# Altium PCB Heartbeat_pcb.PcbDoc
Units mm, origin at the board's own origin, x right, y up, seen from the top; angles counter-clockwise.
Board outline 95.5 x 34 mm, 2 copper layers (Top Layer, Bottom Layer); 39 components, 26 nets, 118 pads, 43 vias.
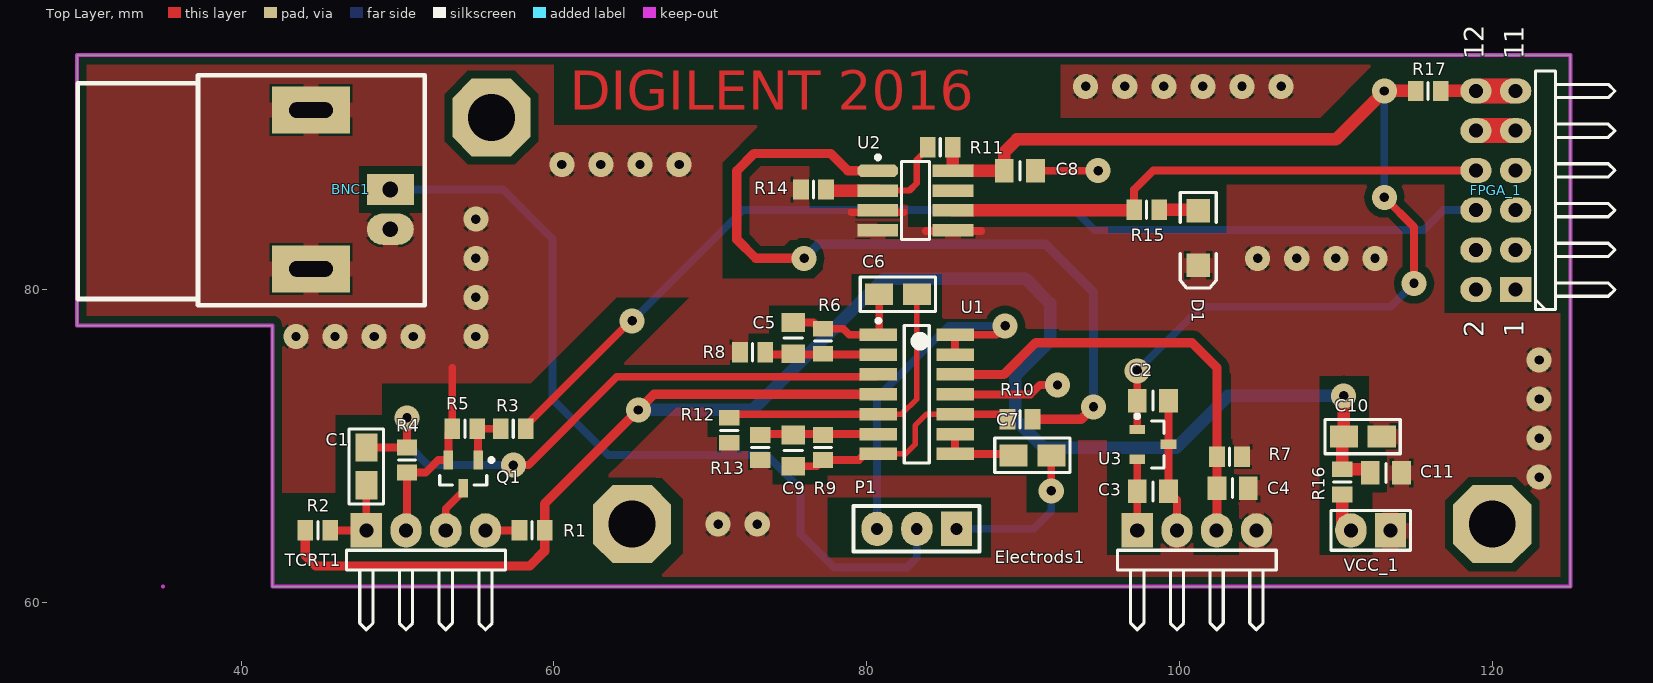
[diagram p0: Top Layer view]
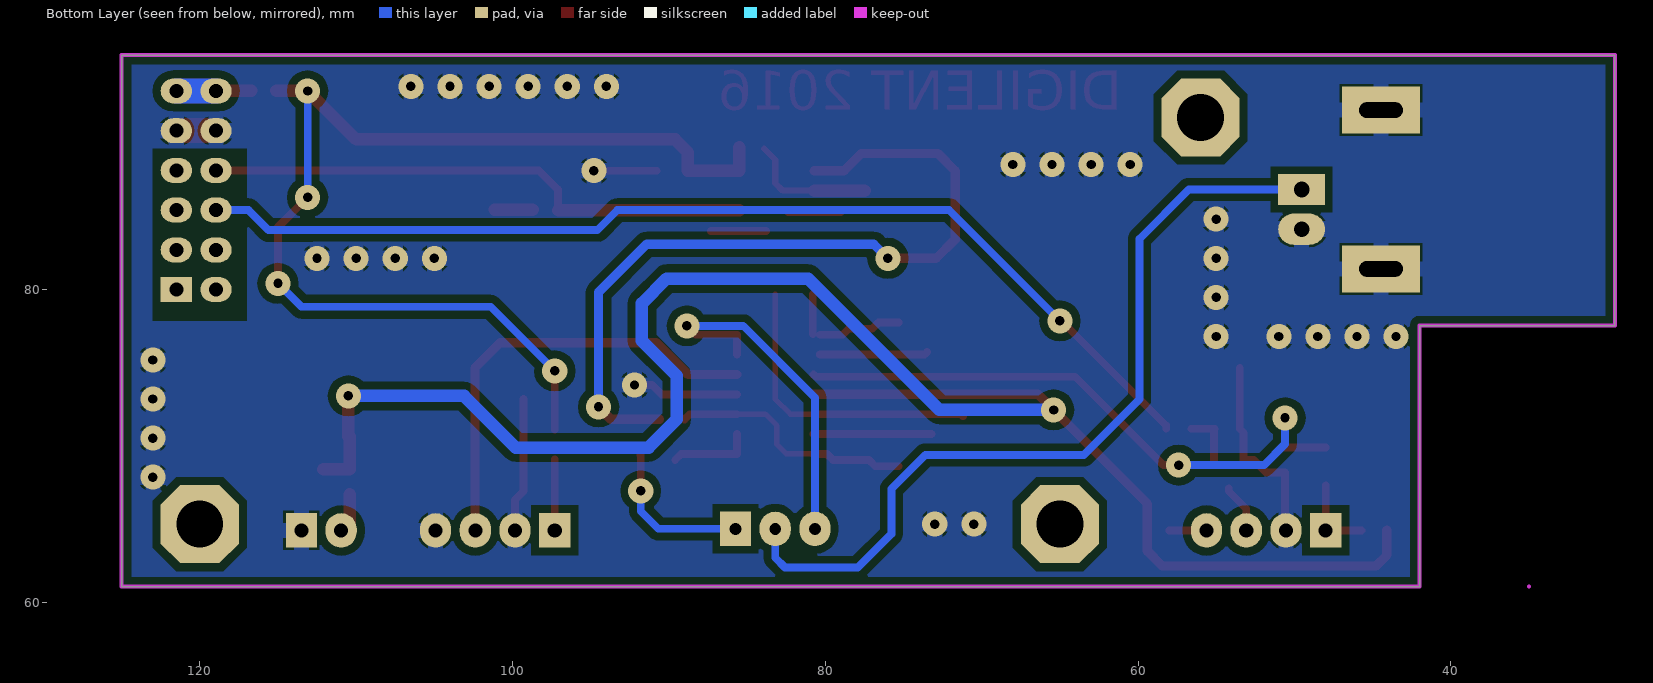
[diagram p1: Bottom Layer view, seen from below]
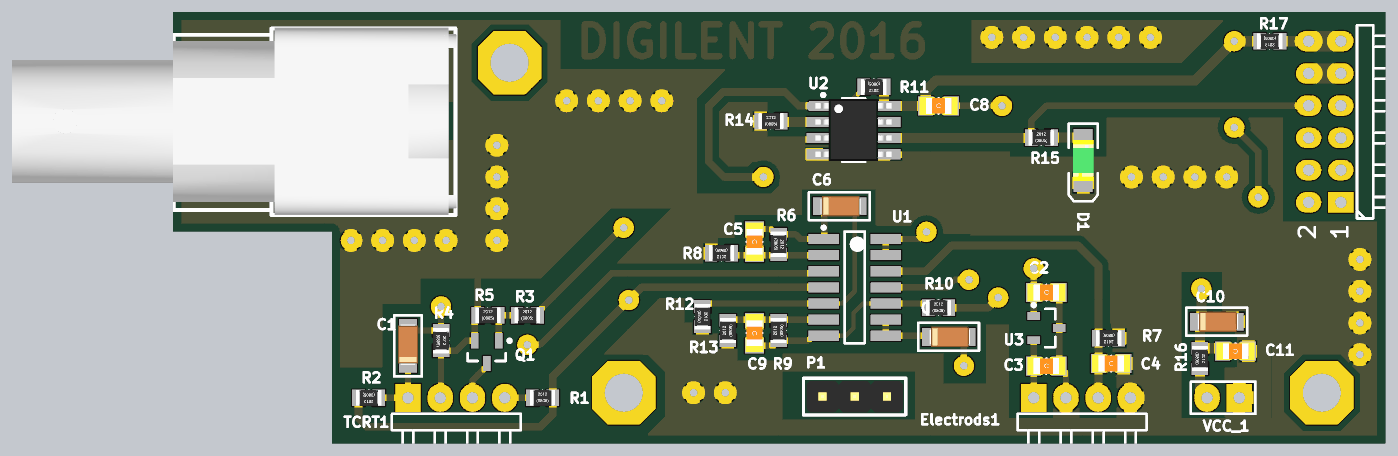
[diagram p2: 3D render of the assembled board from above, using the file's embedded part models]

## Layer stack, top to bottom
Top Solder: solder mask 0.0102, Solder Resist, Dk 3.5
Top Layer: signal copper 0.0356
Dielectric 1: dielectric 0.32, FR-4, Dk 4.8
Bottom Layer: signal copper 0.0356
Bottom Solder: solder mask 0.0102, Solder Resist, Dk 3.5

## Board outline
29.5,77.7 42,77.7 42,61 125,61 125,95 29.5,95

## Design rules (kind name [scope] priority, off if disabled: settings)
Clearance [All] p1: gap=0.25
ComponentClearance [All] p1: gap=0 collisioncheckmode=3 verticalgap=0 showdistances=FALSE
Height [All] p1: minheight=0 maxheight=50 prefheight=12.7
PolygonConnect [All] p1: connectstyle=Relief reliefconductorwidth=1 reliefentries=4 polygonreliefangle="90 Angle" airgapwidth=0.15
RoutingVias [All] p1: holewidth=0.6 width=1.6 viastyle="Through Hole" minholewidth=0.15 minwidth=0.45 maxholewidth=0.6 maxwidth=1.6
SolderMaskExpansion [All] p1: expansion=0.102
UnpouredPolygon [All] p1: allowunpoured=FALSE
Width [All] p1: maxlimit=3 minlimit=0.1 preferedwidth=0.5
27 further rules are at their usual default settings.

## Components (designator, comment, footprint, x,y, rotation, side; value= is the part's Value field where it differs from the comment)
BNC1 "BNC FEMALE CONN" "BNC CONNECTOR" 43,86.4 r90 top
C1 "Cap Pol1" "Condensator SMD tantal case A" 48,68.7 r90 top
C2 "Cap" "capacitor 2012[0805]" 98.3,72.9 r180 top
C3 "Cap" "capacitor 2012[0805]" 98.3,67.1 r180 top
C4 "Cap" "capacitor 2012[0805]" 103.4,67.3 r180 top
C5 "Cap" "capacitor 2012[0805]" 75.3,76.9 r90 top
C6 "Cap Pol1" "Condensator SMD tantal case A" 82,79.7 r0 top
C7 "Cap Pol1" "Condensator SMD tantal case A" 90.6,69.4 r0 top
C8 "Cap" "capacitor 2012[0805]" 89.8,87.6 r180 top
C9 "Cap" "capacitor 2012[0805]" 75.3,69.7 r90 top
C10 "Cap Pol1" "Condensator SMD tantal case A" 111.725,70.6 r0 top
C11 "Cap" "capacitor 2012[0805]" 113.2,68.275 r0 top
D1 "LED0" "led smd verde" 101.2,83.3 r270 top
Electrods1 "Header 4H" HDR1X4H 97.3,64.6 r0 top
FPGA_1 "Header 6X2H" HDR2X6H 121.5,80 r90 top
P1 "Header 3" hdr3 83.2,64.7 r180 top
Q1 "2N3904" SOT23-3L 54.2,68.2 r270 top
R1 "Res2" 2012(rezistor) 58.6,64.6 r0 top
R2 "Res2" 2012(rezistor) 44.9,64.6 r180 top
R3 "Res2" 2012(rezistor) 57.4,71.1 r0 top
R4 "Res2" 2012(rezistor) 50.6,69.1 r270 top
R5 "Res2" 2012(rezistor) 54.3,71.1 r0 top
R6 "Res2" 2012(rezistor) 77.2,76.7 r270 top
R7 "Res2" 2012(rezistor) 103.2,69.3 r180 top
R8 "Res2" 2012(rezistor) 72.7,76 r180 top
R9 "Res2" 2012(rezistor) 77.2,69.9 r90 top
R10 "Res2" 2012(rezistor) 89.8,71.7 r0 top
R11 "Res2" 2012(rezistor) 84.7,89.1 r180 top
R12 "Res2" 2012(rezistor) 71.2,71 r270 top
R13 "Res2" 2012(rezistor) 73.2,69.9 r90 top
R14 "Res2" 2012(rezistor) 76.6,86.4 r0 top
R15 "Res2" 2012(rezistor) 97.9,85.1 r0 top
R16 "Res2" 2012(rezistor) 110.4,67.7 r270 top
R17 "Res2" 2012(rezistor) 115.9,92.7 r180 top
TCRT1 "Header 4H" HDR1X4H 48,64.6 r0 top
U1 "MAX4094" SOIC127P600-14M 83.2,73.3 r0 top
U2 "Component_1" "SOIC 8 pini" 83.1,85.7 r0 top
U3 "MAX6061" SOT23-3_L 98.3,70.1 r0 top (schematic designator U*1)
VCC_1 "Header 2" HDR1X2 113.5,64.6 r180 top

## Footprints (in the part's own frame and the unit in brackets; to place one, negate y for a bottom-side part, rotate by r counter-clockwise, add the part's x,y. Pads: shape width x height; smd on the part's side, far side on the other; paste and mask are expansions set on the pad)
2012(rezistor) [mm] "Rezistor SMD (2,0 X 1,2) mm"
  rect 1x1.3 smd: 1(-0.8,0) 2(0.8,0)
  silkscreen extent 0,-0.55 0,0.55, body extent -1,-0.62 1,0.63, height 0.45
"BNC CONNECTOR" [mm]
  rect 2x3 hole 1 unplated: 1(0,-6.54)
  oval 2x3 hole 1 unplated: 2(-2.54,-6.54)
  rect 3x5 hole 1 slot 2.8 at 90 deg unplated: ""(-5.08,-1.46) ""(5.08,-1.46)
  silkscreen extent -7.4,-8.74 7.3,13.46, body extent -7.4,-8.84 7.36,26.21, height 16.29
"capacitor 2012[0805]" [mm]
  rect 1.2x1.5 smd: 1(-1,0) 2(1,0)
  silkscreen extent 0,-0.6 0,0.6, body extent -1.5,-0.7 1.5,0.7, height 0.93
"Condensator SMD tantal case A" [mm]
  rect 1.8x1.4 smd: 1(-1.21,0) 2(1.21,0)
  silkscreen extent -2.41,-1.1 2.39,1.1, body extent -1.51,-0.8 1.69,0.8, height 1.6
HDR1X2 [mm] "Connector; Header; 2 Position"
  rect 2x2.2 hole 0.9: 1(0,0)
  oval 2x2.2 hole 0.9: 2(2.54,0)
  silkscreen extent -1.27,-1.27 3.81,1.27
HDR1X4H [mm] "Connector; Header; 4 Position; Right Angle"
  rect 2x2.2 hole 0.9: 1(0,0)
  oval 2x2.2 hole 0.9: 2(2.54,0) 3(5.08,0) 4(7.62,0)
  silkscreen extent -1.27,-6.35 8.89,-1.27
HDR2X6H [mm] "Connector; Header; 6x2 Position; Right Angle"
  rect 1.6x2 hole 0.9: 1(0,0)
  oval 1.6x2 hole 0.9: 2(0,2.54) 3(2.54,0) 4(2.54,2.54) 5(5.08,0) 6(5.08,2.54) 7(7.62,0) 8(7.62,2.54) 9(10.16,0) 10(10.16,2.54) 11(12.7,0) 12(12.7,2.54)
  silkscreen extent -1.27,-6.35 13.97,-1.27
hdr3 [mm] "header 3 pini (2,54mm)"
  rect 2x2.2 hole 0.762: 1(-2.54,0)
  oval 2x2.2 hole 0.762: 2(0,0) 3(2.54,0)
  silkscreen extent -4.02,-1.45 4.04,1.45, body extent -3.81,-1.24 3.81,1.25, height 8.54
"led smd verde" [mm]
  rect 1.5x1.5 smd: 1(-1.75,0) 2(1.75,0)
  silkscreen extent -2.9,-1.15 3.2,1.15, body extent -1.6,-0.79 1.6,0.81, height 1.11
SOIC127P600-14M [mm] "SOIC, 14-Leads, Body 8.7x3.9mm, Pitch 1.27mm, IPC Low Density"
  rect 2.4x0.8 smd: 1(-2.45,3.81) 2(-2.45,2.54) 3(-2.45,1.27) 4(-2.45,0) 5(-2.45,-1.27) 6(-2.45,-2.54) 7(-2.45,-3.81) 8(2.45,-3.81) 9(2.45,-2.54) 10(2.45,-1.27) 11(2.45,0) 12(2.45,1.27) 13(2.45,2.54) 14(2.45,3.81)
  silkscreen extent -2.57,-4.4 0.8,4.83, body extent -2,-4.38 2,4.38, height 1.75
"SOIC 8 pini" [mm]
  oct 2.6x0.8 smd: 1(-2.387,1.905)
  rect 2.6x0.8 smd: 2(-2.387,0.635) 3(-2.387,-0.635) 4(-2.387,-1.905) 5(2.413,-1.905) 6(2.413,-0.635) 7(2.413,0.635) 8(2.413,1.905)
  silkscreen extent -2.51,-2.5 0.91,2.88, body extent -3,-2.45 3,2.45, height 1.75
SOT23-3_L [mm] "SOT23, 3-Leads, Body 2.9x1.3mm, Pitch 0.95mm, Lead Span 2.3mm, IPC High Density"
  rect 1x0.6 smd: 1(-1,0.95) 2(-1,-0.95) 3(1,0)
  silkscreen extent -1.12,-1.5 0.7,1.92, body extent -0.7,-1.5 0.7,1.5, height 1.2
SOT23-3L [mm] "SOT23, 3-Leads, Body 2.9x1.3mm, Pitch 0.95mm, Lead Span 2.5mm, IPC High Density"
  rect 1.2x0.6 smd: 1(-0.9,0.95) 2(-0.9,-0.95) 3(0.9,0)
  silkscreen extent -1.02,-1.5 0.7,1.93, body extent -0.7,-1.5 0.7,1.5, height 1.1

## Part data
C1 C6 C7 C10: "Polarized Capacitor (Radial)"
C2 C3 C4 C5 C8 C9 C11: "Capacitor"
D1: "Typical INFRARED GaAs LED"
Electrods1 TCRT1: "Header, 4-Pin, Right Angle"
FPGA_1: "Header, 6-Pin, Dual row, Right Angle"
P1: "Header, 3-Pin"
Q1: "NPN General Purpose Amplifier"
R1 R2 R3 R4 R5 R6 R7 R8 R9 R10 R11 R12 R13 R14 R15 R16 R17: "Resistor"
U3: "Precision, Micropower, Low-Dropout,  High-Output-Current, SOT23 Voltage References"
VCC_1: "Header, 2-Pin"

## Free pads (board coordinates)
  oct 5x5 hole 3: ""(56,91) ""(65,65) ""(120,65)

## Via types
v1: diameter 1.6, hole 0.6, Top Layer to Bottom Layer, 43 vias

## Nets (pads, with @x,y where several pads share a name; then routed paths per layer and width w, separated by ;. In a path a pad name is that pad's centre, name@x,y a point inside that pad or via, vN(x,y) a via of type N, cw(c..) or ccw(c..) an arc to the next point about the centre after c; other vN are vias at no path point)
+3.3V: C2.2 C8.2 R11.1 R17.2 U2.8 U3.1 | length 70.8
  Top Layer w0.5: U3.1 C2.2@97.3,73 ; C2.2 v1(97.3,74.8) ; v1(113.1,85.9) 115,84 v1(115,80.4)
  Top Layer w0.8: R11.1@85.513,89.087 U2.8 88.795,87.605 88.795,88.795 89.6,89.6 110,89.6 v1(113.1,92.7) R17.2
  Bottom Layer w0.5: v1(97.3,74.8) 101.4,78.9 113.5,78.9 v1(115,80.4) ; v1(113.1,85.9) v1(113.1,92.7)
+5V: C10.1 C11.1 R1.2 R2.2 R16.1 U1.4 | length 113.2
  Top Layer w0.6: R2.2 44.1,63 44.775,62.325 58.45,62.325 59.4,63.275 R1.2 59.4,66.3 66.4,73.3 U1.4
  Top Layer w0.8: C10.1@110.4,70.6 R16.1 C11.1@112.1,68.5 ; v1(110.5,73.2) 110.515,73.185 C10.1
  Bottom Layer w0.8: v1(65.4,72.3) 72.7,72.3 81.1,80.7 90.15,80.7 91.725,79.125 91.725,76.725 89.5,74.5 89.5,71.7 91.3,69.9 99.8,69.9 103.1,73.2 v1(110.5,73.2)
DGND: BNC1. BNC1.2 C2.1 C3.1 C4.1 C8.1 C10.2 C11.2 D1.2 Electrods1.2 Electrods1.4 FPGA_1.9 FPGA_1.10 Q1.2 R4.2 R5.1 R7.1 R8.2 R12.2 R13.1 R14.1 TCRT1.2 U1.11 U2.3 U2.4 U2.5 U3.3 VCC_1.1 | length 41.4
  Top Layer w0.5: TCRT1.2@50.6,64.66 R4.2 51.8,68.3 52.6,69.1 Q1.2 53.25,70.85 R5.1 53.5,75 ; 79.025,84.95 82.35,84.95 ; 83.8,83.75 87.325,83.75 ; U1.11 90.475,73.3 91.075,73.9 v1(92.2,73.9) ; C8.1 v1(94.8,87.6) ; C2.1@99.3,73 U3.3 C3.1 99.84,66.56 Electrods1.2
  Top Layer w1.6: FPGA_1.10 FPGA_1.9
  other v1: 70.5,65 73,65 123,68 123,70.5 123,73 123,75.5 43.5,77 46,77 48.5,77 51,77 55,77 55,79.5 55,82 105,82 107.5,82 110,82 112.5,82 55,84.5 60.5,88 63,88 65.5,88 68,88 94,93 96.5,93 99,93 101.5,93 104,93 106.5,93
NetBNC1_1: BNC1.1 P1.2 | length 53.5
  Bottom Layer w0.5: BNC1.1 56.75,86.4 59.9,83.25 59.9,73 63.475,69.425 73.6,69.425 75.775,67.25 75.775,64.375 77.925,62.225 82.575,62.225 83.2,62.85 P1.2
NetC1_1: C1.1 R2.1 TCRT1.1 | length 5.2
  Top Layer w0.5: R2.1 TCRT1.1 C1.1
NetC1_2: C1.2 R4.1 U1.3 | length 39.3
  Top Layer w0.5: C1.2 R4.1@50.59,69.91 ; R4.1 v1(50.6,71.8) ; v1(57.4,68.775) 58.375,68.775 64.025,74.425 80.605,74.425 U1.3
  Bottom Layer w0.5: v1(50.6,71.8) 50.6,70.125 51.95,68.775 v1(57.4,68.775)
NetC3_2: C3.2 Electrods1.1 U3.2 | length 4.5
  Top Layer w0.5: Electrods1.1 C3.2 U3.2
NetC4_2: C4.2 Electrods1.3 R7.2 U1.12 | length 28.7
  Top Layer w0.6: U1.12 88.77,74.57 90.8,76.6 100.8,76.6 102.4,75 R7.2 102.4,64.62 Electrods1.3
NetC5_1: C5.1 R6.2 R8.1 U1.2 | length 6.9
  Top Layer w0.5: R8.1 73.66,75.84 U1.2@80.35,75.84
NetC6_2: C6.2 R12.1 U1.5 | length 19.2
  Top Layer w0.35: U1.5 82.23,72.03 83.2,73 83.2,79.69 C6.2
  Top Layer w0.5: R12.1@71.2,71.9 71.33,72.03 U1.5
NetC7_1: C7.1 U1.8 U1.9 | length 5.4
  Top Layer w0.5: U1.9 U1.8 89.21,69.49 89.59,69.11 C7.1@89.59,69.1
NetC7_2: C7.2 P1.1 | length 10.1
  Top Layer w0.5: v1(91.8,67.125) 91.8,69.39 C7.2
  Bottom Layer w0.5: P1.1 90.675,64.7 91.8,65.825 v1(91.8,67.125)
NetC9_2: C9.2 R9.2 R13.2 U1.6 | length 7.6
  Top Layer w0.5: R13.2@73.2,70.76 U1.6
NetD1_1: D1.1 R15.2 | length 2.4
  Top Layer w0.8: R15.2 D1.1@101.15,85.1
NetQ1_2: Q1.1 R3.1 R5.2 | length 3.5
  Top Layer w0.5: Q1.1 55.15,71.05 R5.2 R3.1
NetQ1_3: Q1.3 TCRT1.3 | length 3.2
  Top Layer w0.5: TCRT1.3 53.08,65.98 54.2,67.1 Q1.3
NetR1_1: R1.1 TCRT1.4 | length 2.4
  Top Layer w0.5: TCRT1.4 R1.1@58,64.6
NetR10_2: R10.2 U2.1 | length 50.8
  Top Layer w0.6: v1(76,82) 72.9,82 71.7,83.2 71.7,87.6 72.8,88.7 77.7,88.7 78.795,87.605 U2.1 ; R10.2 93.7,71.7 v1(94.5,72.5)
  Bottom Layer w0.6: v1(76,82) 76.9,82.9 91.425,82.9 94.5,79.825 v1(94.5,72.5)
NetR11_2: R11.2 R14.2 U2.2 | length 8.4
  Top Layer w0.4: U2.2 82.735,86.335 83.2,86.8 83.2,88.3 R11.2@83.9,89
  Top Layer w0.8: R14.2@77.465,86.335 U2.2
NetR16_2: R16.2 VCC_1.2 | length 2.5
  Top Layer w0.8: R16.2 110.4,65.16 VCC_1.2
ON/OFF: FPGA_1.6 R3.2 | length 67.7
  Top Layer w0.5: R3.2 58.2,71.3 64.9,78 v1(65,78)
  Bottom Layer w0.5: v1(65,78) 72.08,85.08 93.3,85.08 94.58,83.8 115.6,83.8 116.88,85.08 FPGA_1.6
OUT_G: P1.3 U1.13 U1.14 | length 23.2
  Top Layer w0.5: U1.13 U1.14 88.282,77.11 v1(88.85,77.678)
  Bottom Layer w0.5: P1.3 80.66,73.085 85.253,77.678 v1(88.85,77.678)
PULSE_OUT: FPGA_1.8 R15.1 U2.6 | length 35.2
  Top Layer w0.5: R15.1 97.1,86.4 98.32,87.62 FPGA_1.8
  Top Layer w0.8: U2.6 R15.1@97.065,85.065
STAGE2: C5.2 C6.1 R6.1 U1.1 | length 7.9
  Top Layer w0.5: C5.2 76.6,77.9 77,77.5 R6.1 78.5,77.5 78.89,77.11 U1.1@80.35,77.11 ; C6.1 80.8,79.69 U1.1@80.8,77.16
STAGE3: C9.1 R9.1 R10.1 U1.7 U1.10 | length 15.9
  Top Layer w0.35: U1.7 82.49,69.49 83.1,70.1 83.1,71.3 83.83,72.03 U1.10
  Top Layer w0.5: C9.1 76.8,68.7 R9.1 79.5,69.1 79.89,69.49 U1.7 ; U1.10 88.67,72.03 R10.1
VCC: FPGA_1.11 FPGA_1.12 R17.1 | length 7.3
  Top Layer w0.8: R17.1 FPGA_1.12
  Top Layer w1.6: FPGA_1.12 FPGA_1.11
  Bottom Layer w1.6: FPGA_1.12 FPGA_1.11
pads on no net: FPGA_1.1 FPGA_1.2 FPGA_1.3 FPGA_1.4 FPGA_1.5 FPGA_1.7 U2.7

## Polygon pours and split planes (outlines as drawn)
DGND on Bottom Layer "GND" (solid, pour order 2): 29.5,95 125,95 125,61 42,61 42,77.7 29.5,77.7
DGND on Top Layer "GND" (solid, pour order 10): 42,74 42,67 45,67 46,67 46,72 49,72 49,74
DGND on Top Layer "GND" (solid, pour order 8): 110,95 29.5,95 29.5,77.7 42,77.7 42,74 51,74 58.5,74 64,79.5 70.75,79.5 70.75,88.125 73.625,91 109,91 113,95
DGND on Top Layer "GND" (solid, pour order 6): 71.587,70.55 69.787,70.55 69.787,71.85 69.787,72.45 67.787,72.45 63.887,68.55 63.862,68.55 63.287,67.975 66.887,67.975 67.287,67.575 68.263,66.6 68.263,65.025 68.263,63.125 66.137,61 124.962,61 124.962,68.3 124.962,69 124.437,69 116.062,69 116.062,67.5 116.062,63 116.037,63 112.452,63 108.937,63 100.887,63 100.887,65.25 100.887,66.375 99.312,66.375 98.812,66.375 98.812,64.3 98.812,63 97.087,63 95.362,63 95.362,65.2 95.362,70.375 93.812,70.375 93.537,70.375 93.537,67.775 93.537,65.725 91.387,65.725 90.188,65.725 90.188,67.4 90.188,68.1 86.488,68.1 77.512,68.1 77.512,66.85 77.512,66.675 85.437,66.675 87.938,66.675 87.938,65.2 87.938,62.875 85.863,62.875 77.512,62.875 77.512,65.925 77.512,67.525 74.962,67.525 73.962,67.525 73.962,69.25 73.962,69.65 72.337,69.65 71.987,69.65 71.987,70.55
DGND on Top Layer "GND" (solid, pour order 4): 76.325,86.3 76.325,87.9 75.625,87.9 73.225,87.9 72.425,87.1 72.425,83.6 73.225,82.8 74.725,82.8 75.125,83.2 75.625,83.2 76.525,83.2 76.725,83 77.225,82.5 77.225,81.3 76.625,80.7 76.525,80.7 69.875,80.7 64.175,75 72.425,75 72.425,75.5 72.425,77.2 73.325,77.2 73.725,77.2 73.725,77.8 73.725,79 74.825,79 79.025,79 79.025,80.1 79.025,81 80.525,81 84.825,81 84.825,78.15 88.925,78.15 88.925,77.5 92.325,77.5 92.325,76.3 98.225,76.3 101.625,76.3 102.625,75.3 103.325,74.6 103.325,72.3 103.325,68.3 103.625,68 103.625,67.3 103.625,66.4 103.825,66.2 103.825,64.4 103.825,63 107.725,63 108.925,63 108.925,64.7 108.925,74.5 110.425,74.5 112.125,74.5 112.125,69.8 113.175,69.8 113.175,67 112.925,67 112.35,67 112.35,63 114.825,63 116.025,63 116.025,64.5 116.025,69 124.618,69 124.618,78.5 121.925,78.5 116.925,78.5 116.925,83.1 116.925,86.7 112.525,86.7 103.025,86.7 103.025,85 103.025,83.6 95.425,83.6 95.425,84 84.525,84 82.625,84 82.625,85 82.625,85.5 81.125,85.5 79.425,85.5 79.425,85.2 77.625,85.2 76.325,85.2 76.325,85.7

## Keep-outs
Keep-Out Layer:
  lines w0.25: 29.5,77.7 29.5,95 125,95 125,61 42,61 42,77.7 29.5,77.7 ; 35,61 35,61

## Other copper
Top Layer:
  text "DIGILENT 2016" at 61,91.5 h2.5
Bottom Layer:
  pour cut-out: 117,89 123,89 123,78 117,78

## Text inside footprints (layer, text, board x,y; h text height)
FPGA_1: Top Overlay "12" at 119.468,94.732 h1.27 r90; Top Overlay "1" at 122.008,95.748 h1.27 r90; Top Overlay "1" at 122.008,94.732 h1.27 r90; Top Overlay "1" at 122.008,76.952 h1.27 r90; Top Overlay "2" at 119.468,76.952 h1.27 r90